# Altium PCB PCB1.PcbDoc
Units mm, origin at the board's own origin, x right, y up, seen from the top; angles counter-clockwise.
Board outline 26 x 10.5 mm, 2 copper layers (Top Layer, Bottom Layer); 5 components, 3 nets, 17 pads, 5 vias.
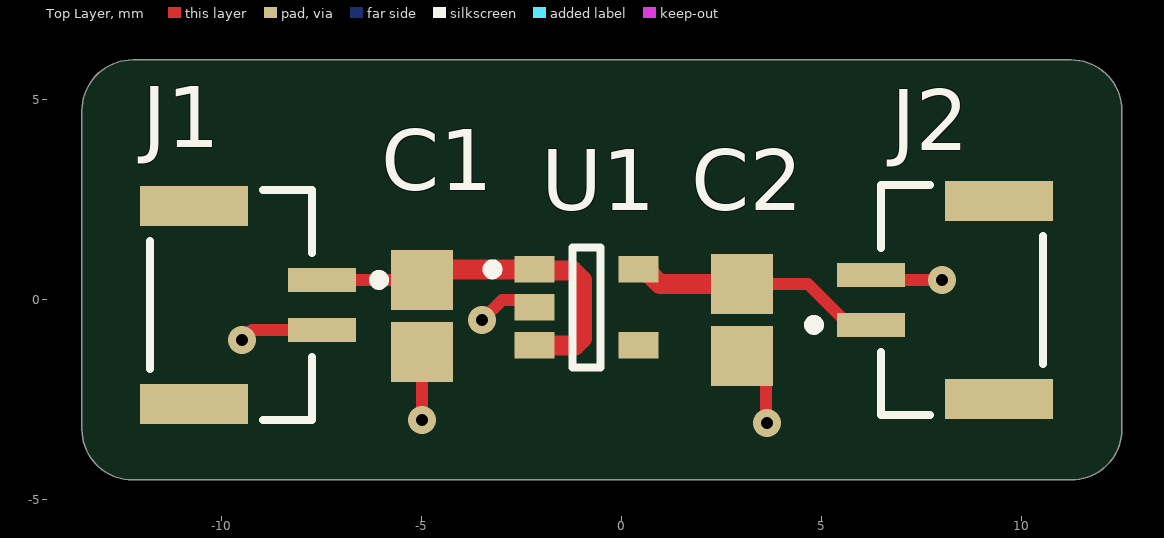
[diagram p0: Top Layer view]
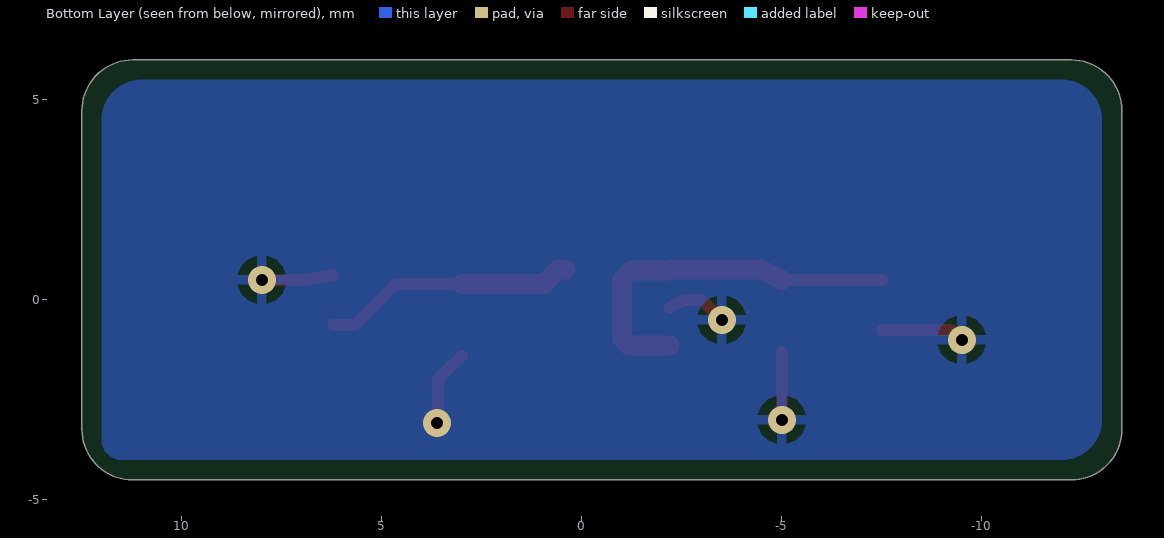
[diagram p1: Bottom Layer view, seen from below]
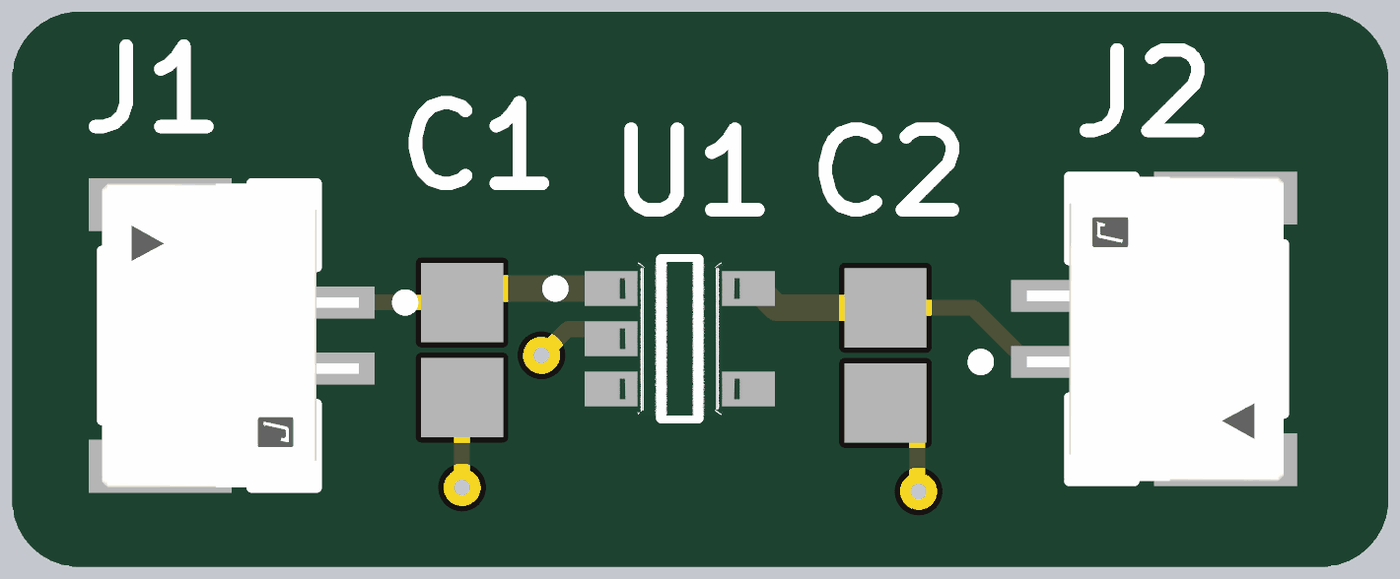
[diagram p2: 3D render of the assembled board from above, using the file's embedded part models]

## Layer stack, top to bottom
Top Solder: solder mask 0.0102, Solder Resist, Dk 3.5
Top Layer: signal copper 0.0356
Dielectric 1: dielectric 0.32, FR-4, Dk 4.8
Bottom Layer: signal copper 0.0356
Bottom Solder: solder mask 0.0102, Solder Resist, Dk 3.5

## Board outline
-13.5,-3.23 ccw(c-12.23,-3.23) -12.23,-4.5 11.23,-4.5 ccw(c11.23,-3.23) 12.5,-3.23 12.5,4.73 ccw(c11.23,4.73) 11.23,6 -12.23,6 ccw(c-12.23,4.73) -13.5,4.73

## Design rules (kind name [scope] priority, off if disabled: settings)
Clearance [All] p1: gap=0.254 ignorepadtopadclearanceinfootprint=FALSE
PolygonConnect [All] p1: connectstyle=Relief reliefconductorwidth=0.254 reliefentries=4 polygonreliefangle="90 Angle" airgapwidth=0.254
RoutingVias [All] p1: holewidth=0.711 width=1.27 viastyle="Through Hole" minholewidth=0.711 minwidth=1.27 maxholewidth=0.711 maxwidth=1.27
SolderMaskExpansion [All] p1: expansion=0.102 istentingtop=FALSE
SupplyNets "Schematic Supply Nets_2" [InNet('+5v')] p1: voltage=0.000
SupplyNets "Schematic Supply Nets_1" [InNet('GND')] p2: voltage=0.000
SupplyNets "Schematic Supply Nets" [InNet('3.3v')] p3: voltage=0.000
Width [All] p1: maxlimit=0.5 minlimit=0.254 preferedwidth=0.3
30 further rules are at their usual default settings.

## Components (designator, comment, footprint, x,y, rotation, side; value= is the part's Value field where it differs from the comment)
C1 "1uf" CAPC2013X100X50ML20T25 -5,-0.4 r90 top
C2 "1uf" CAPC2013X100X50ML20T25 3,-0.5 r90 top
J1 "SM02B-GHS-TB(LF)(SN)" FP-SM02B-GHS-TB_LF_SN-MFG -9.775,-0.125 r270 top
J2 "SM02B-GHS-TB(LF)(SN)" FP-SM02B-GHS-TB_LF_SN-MFG 8.5,0 r90 top
U1 "MIC5317-3.3YM5-TR" FP-SOT23-5LD-PL-1-MFG -0.887,-0.186 r0 top

## Footprints (in the part's own frame and the unit in brackets; to place one, negate y for a bottom-side part, rotate by r counter-clockwise, add the part's x,y. Pads: shape width x height; smd on the part's side, far side on the other; paste and mask are expansions set on the pad)
CAPC2013X100X50ML20T25 [mm] "Chip Capacitor, 2-Leads, Body 2.00x1.25mm, IPC Low Density"
  rect 1.5x1.55 smd: 1(-0.9,0) 2(0.9,0)
  body extent -1.1,-0.72 1.1,0.72, height 1
FP-SM02B-GHS-TB_LF_SN-MFG [mm]
  rect 0.6x1.7 smd paste+0 mask+0: 1(-0.625,2.275) 2(0.625,2.275)
  rect 1x2.7 smd paste+0 mask+0: 3(-2.475,-0.925) 4(2.475,-0.925)
  silkscreen extent -2.88,-2.02 2.88,3.83, body extent -3.08,-2.37 3.08,3.22, height 0.25
FP-SOT23-5LD-PL-1-MFG [mm]
  rect 1x0.66 smd paste+0 mask+0: 1(-1.3,0.95) 2(-1.3,0) 3(-1.3,-0.95) 4(1.3,-0.95) 5(1.3,0.95)
  silkscreen extent -2.47,-1.5 0.35,1.5, body extent -1.9,-1.6 1.9,1.6, height 0.25

## Part data
C1 C2: library part CMP-2007-03676-1, Manufacturer=Kemet, Part Number=C0805C105K8RACTU
J1 J2: library part CMP-2000-07076-2, "CONN HEADER SMD R/A 2POS 1.25MM", Color=Natural, Current Rating=1A, Package Quantity=2500, Voltage Rating=50V, Connector Type="Outer Shroud Contact", Contact Material=Bronze, Contact Plating=Tin, Contact Type="Male Pin", Fastening Type=Latch, Housing Color=Natural, Housing Material=Nylon, Lead Free="Lead Free", Mount="Surface Mount", Number of Contacts=2, Number of Positions=2, Number of Rows=1, Orientation="Right Angle", Packaging="Tape and Reel", Pitch=0.049inch, Series=GH, Termination=Solder
U1: library part CMP-06324-000116-1, "IC REG LINEAR 3.3V 150MA SOT23-5", Case/Package=SOT-23-5, Dropout Voltage=155mV, Max Input Voltage=6V, Max Operating Temperature=125°C, Min Current Limit=200mA, Min Input Voltage=2.5V, Min Operating Temperature=-40°C, Output Current=150mA, Output Voltage=3.3V, Package Quantity=3000, Power Supply Rejection Ratio (PSRR)=70dB, Mount="Surface Mount", Number of Outputs=1, Number of Regulators=1, Packaging="Tape and Reel", RoHS Compliant=No, Series=-

## Via types
v1: diameter 0.7, hole 0.3, Top Layer to Bottom Layer, 5 vias

## Nets (pads, with @x,y where several pads share a name; then routed paths per layer and width w, separated by ;. In a path a pad name is that pad's centre, name@x,y a point inside that pad or via, vN(x,y) a via of type N, cw(c..) or ccw(c..) an arc to the next point about the centre after c; other vN are vias at no path point)
3.3v: C2.2 J2.1 U1.5 | length 6.4
  Top Layer w0.3: C2.2 4.65,0.4 5.675,-0.625 J2.1
  Top Layer w0.5: U1.5 0.583,0.764 0.947,0.4 C2.2
+5v: C1.2 J1.1 U1.1 U1.3 | length 9.4
  Top Layer w0.3: J1.1 C1.2
  Top Layer w0.5: C1.2 -4.475,0.764 U1.1 -2.16,0.737 -1.237,0.737 -1,0.5 -1,-0.96 -1.176,-1.136 U1.3
GND: C1.1 C2.1 J1.2 J2.2 U1.2 | length 9.9
  Top Layer w0.3: v1(-9.5,-1) -9.25,-0.75 J1.2 ; v1(-5,-3) C1.1 ; v1(-3.5,-0.5) -2.997,-0.003 -2.537,-0.006 U1.2 ; v1@3.6,-3.075 3.6,-2 C2.1 C2.1@3.625,-2 ; J2.2 6.925,0.5 v1(8,0.5)
  other v1: 3.625,-3.075
pads on no net: J1.3 J1.4 J2.3 J2.4 U1.4

## Polygon pours and split planes (outlines as drawn)
GND on Bottom Layer "GND_L02_P001" (solid, pour order 1): -13,4.5 cw(c-12,4.5) -12,5.5 11,5.5 cw(c11,4.5) 12,4.5 12,-3.5 cw(c11.5,-3.5) 11.5,-4 -12,-4 cw(c-12,-3) -13,-3 -13,1

## Silkscreen, mask and mechanical layers (free items; w line width, h text height)
Mechanical 1:
  the board outline again, w0.254